# Altium PCB SA_1800_WIFI.PcbDoc (part 1 of 2)
Units mm, origin at the board's own origin, x right, y up, seen from the top; angles counter-clockwise.
Board outline 82.96 x 62.54 mm, 2 copper layers (Top Layer, Bottom Layer); 208 components, 153 nets, 664 pads, 246 vias.
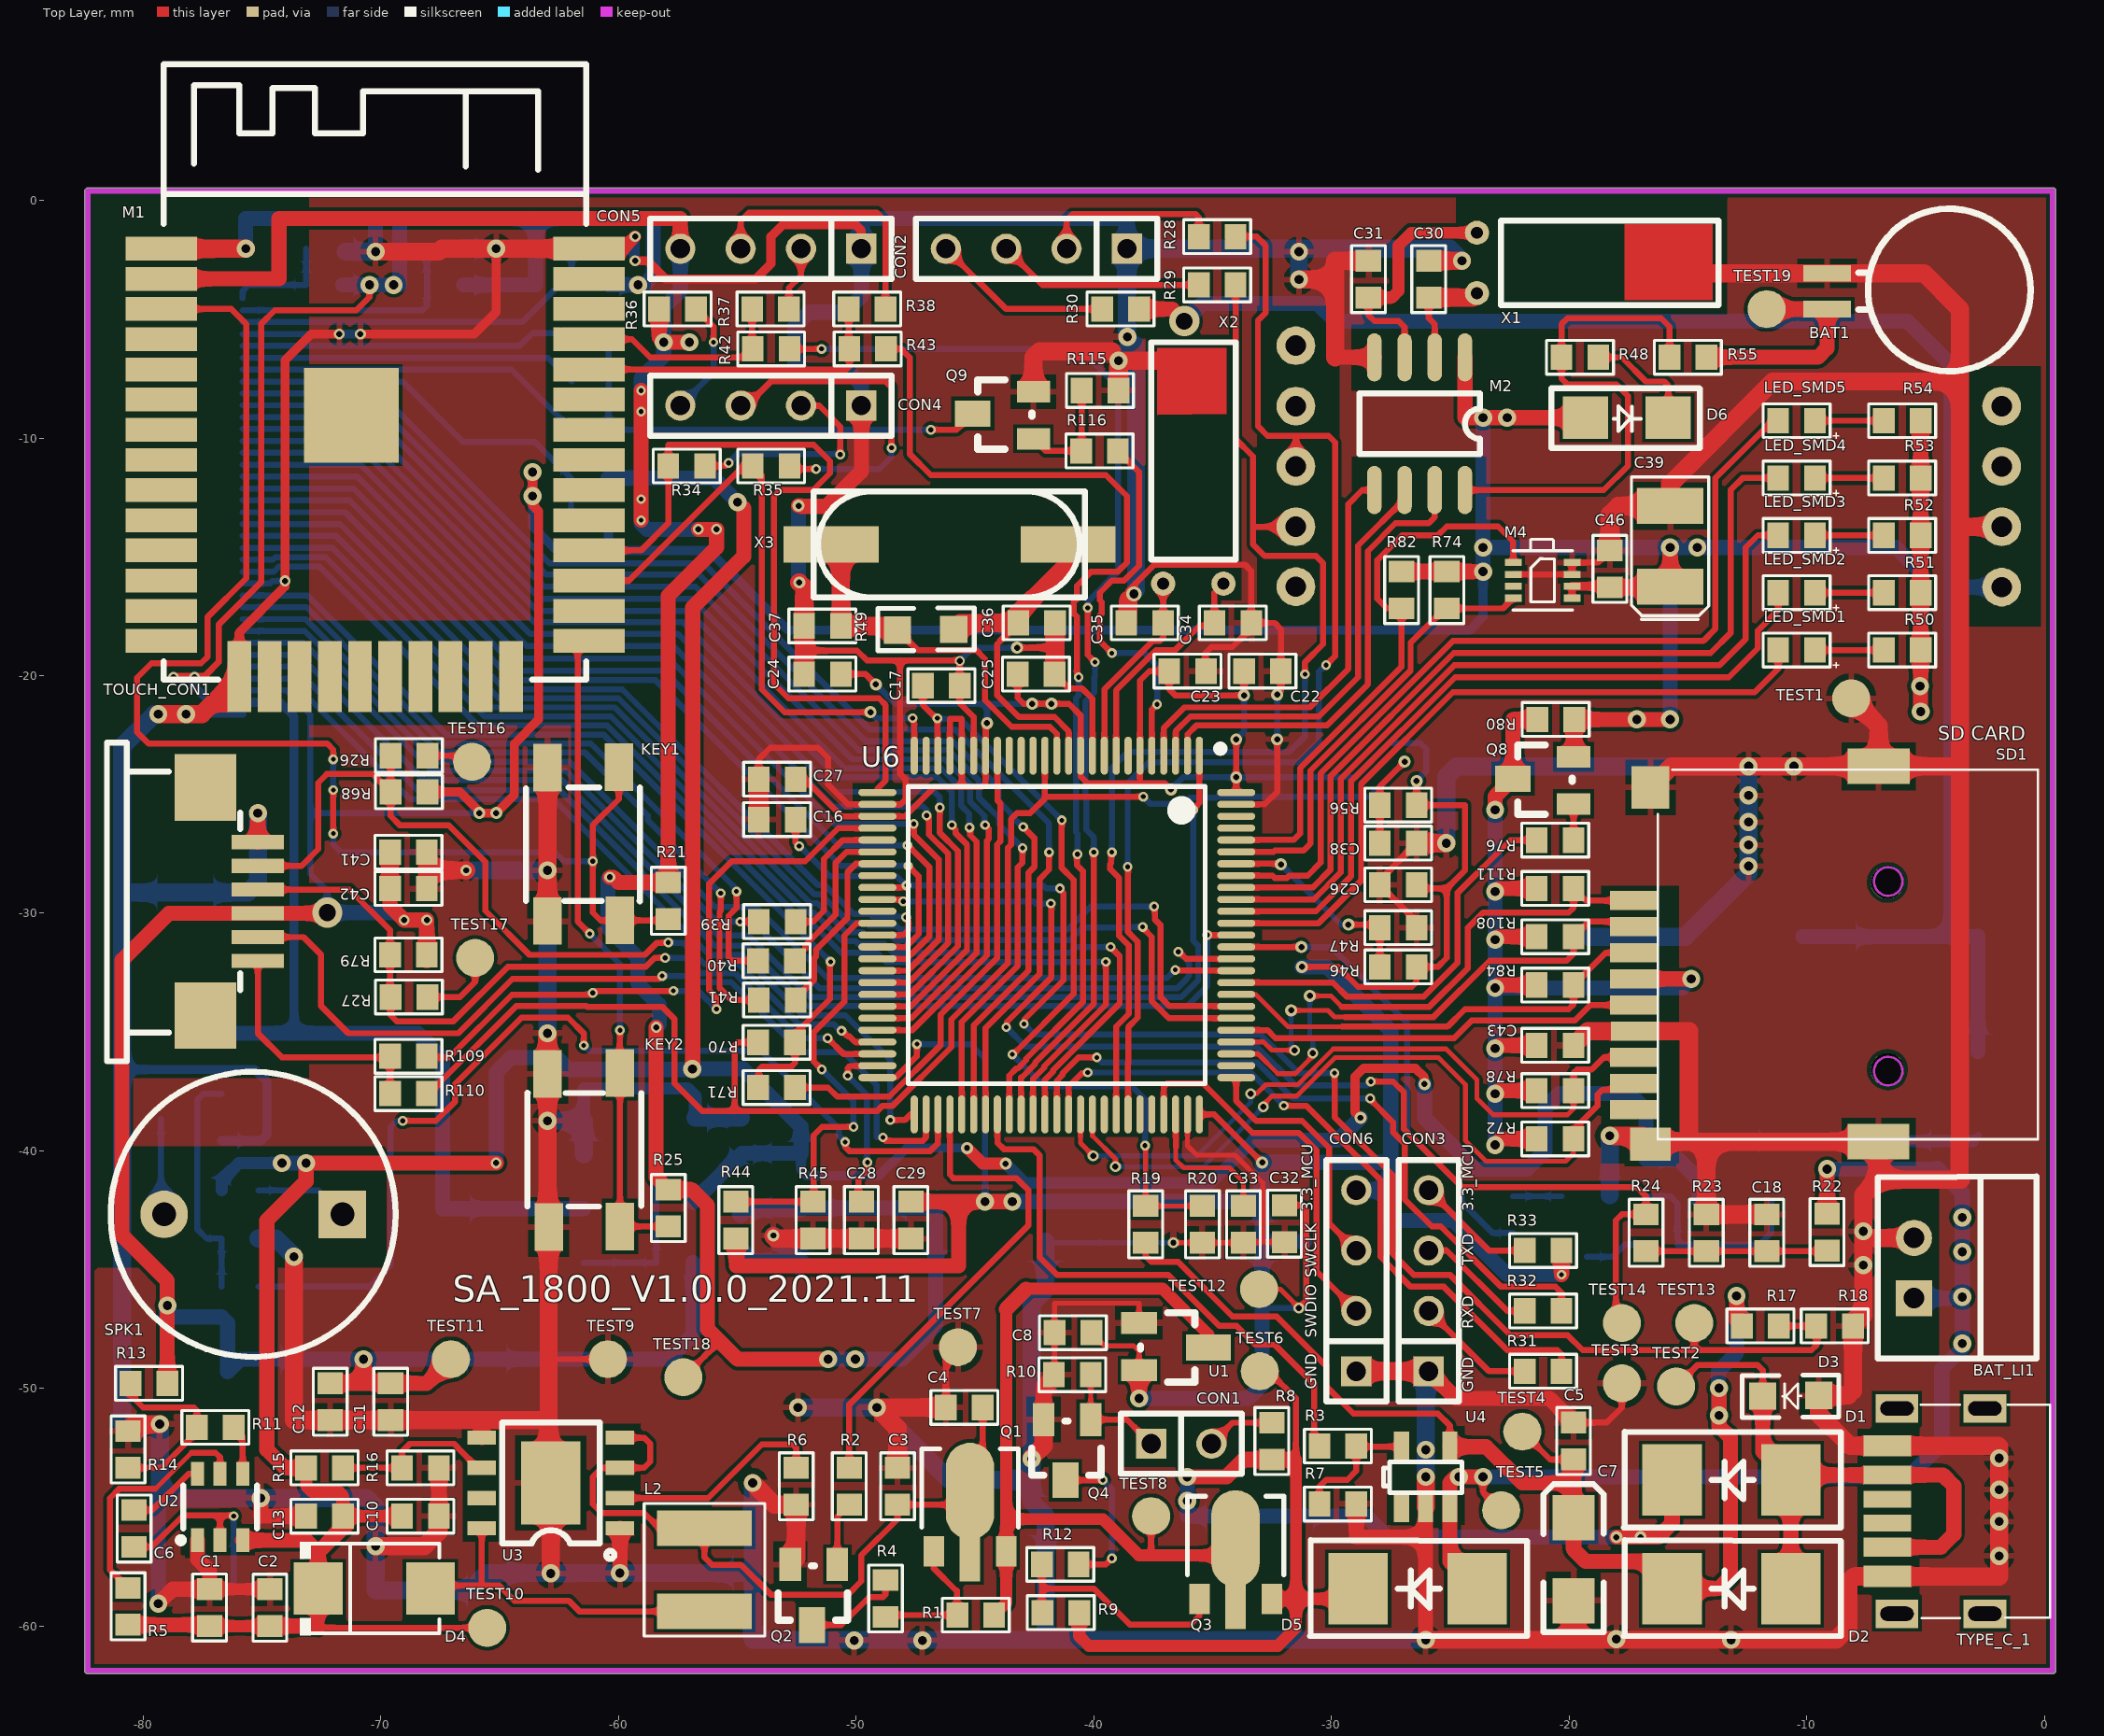
[diagram p0: Top Layer view]
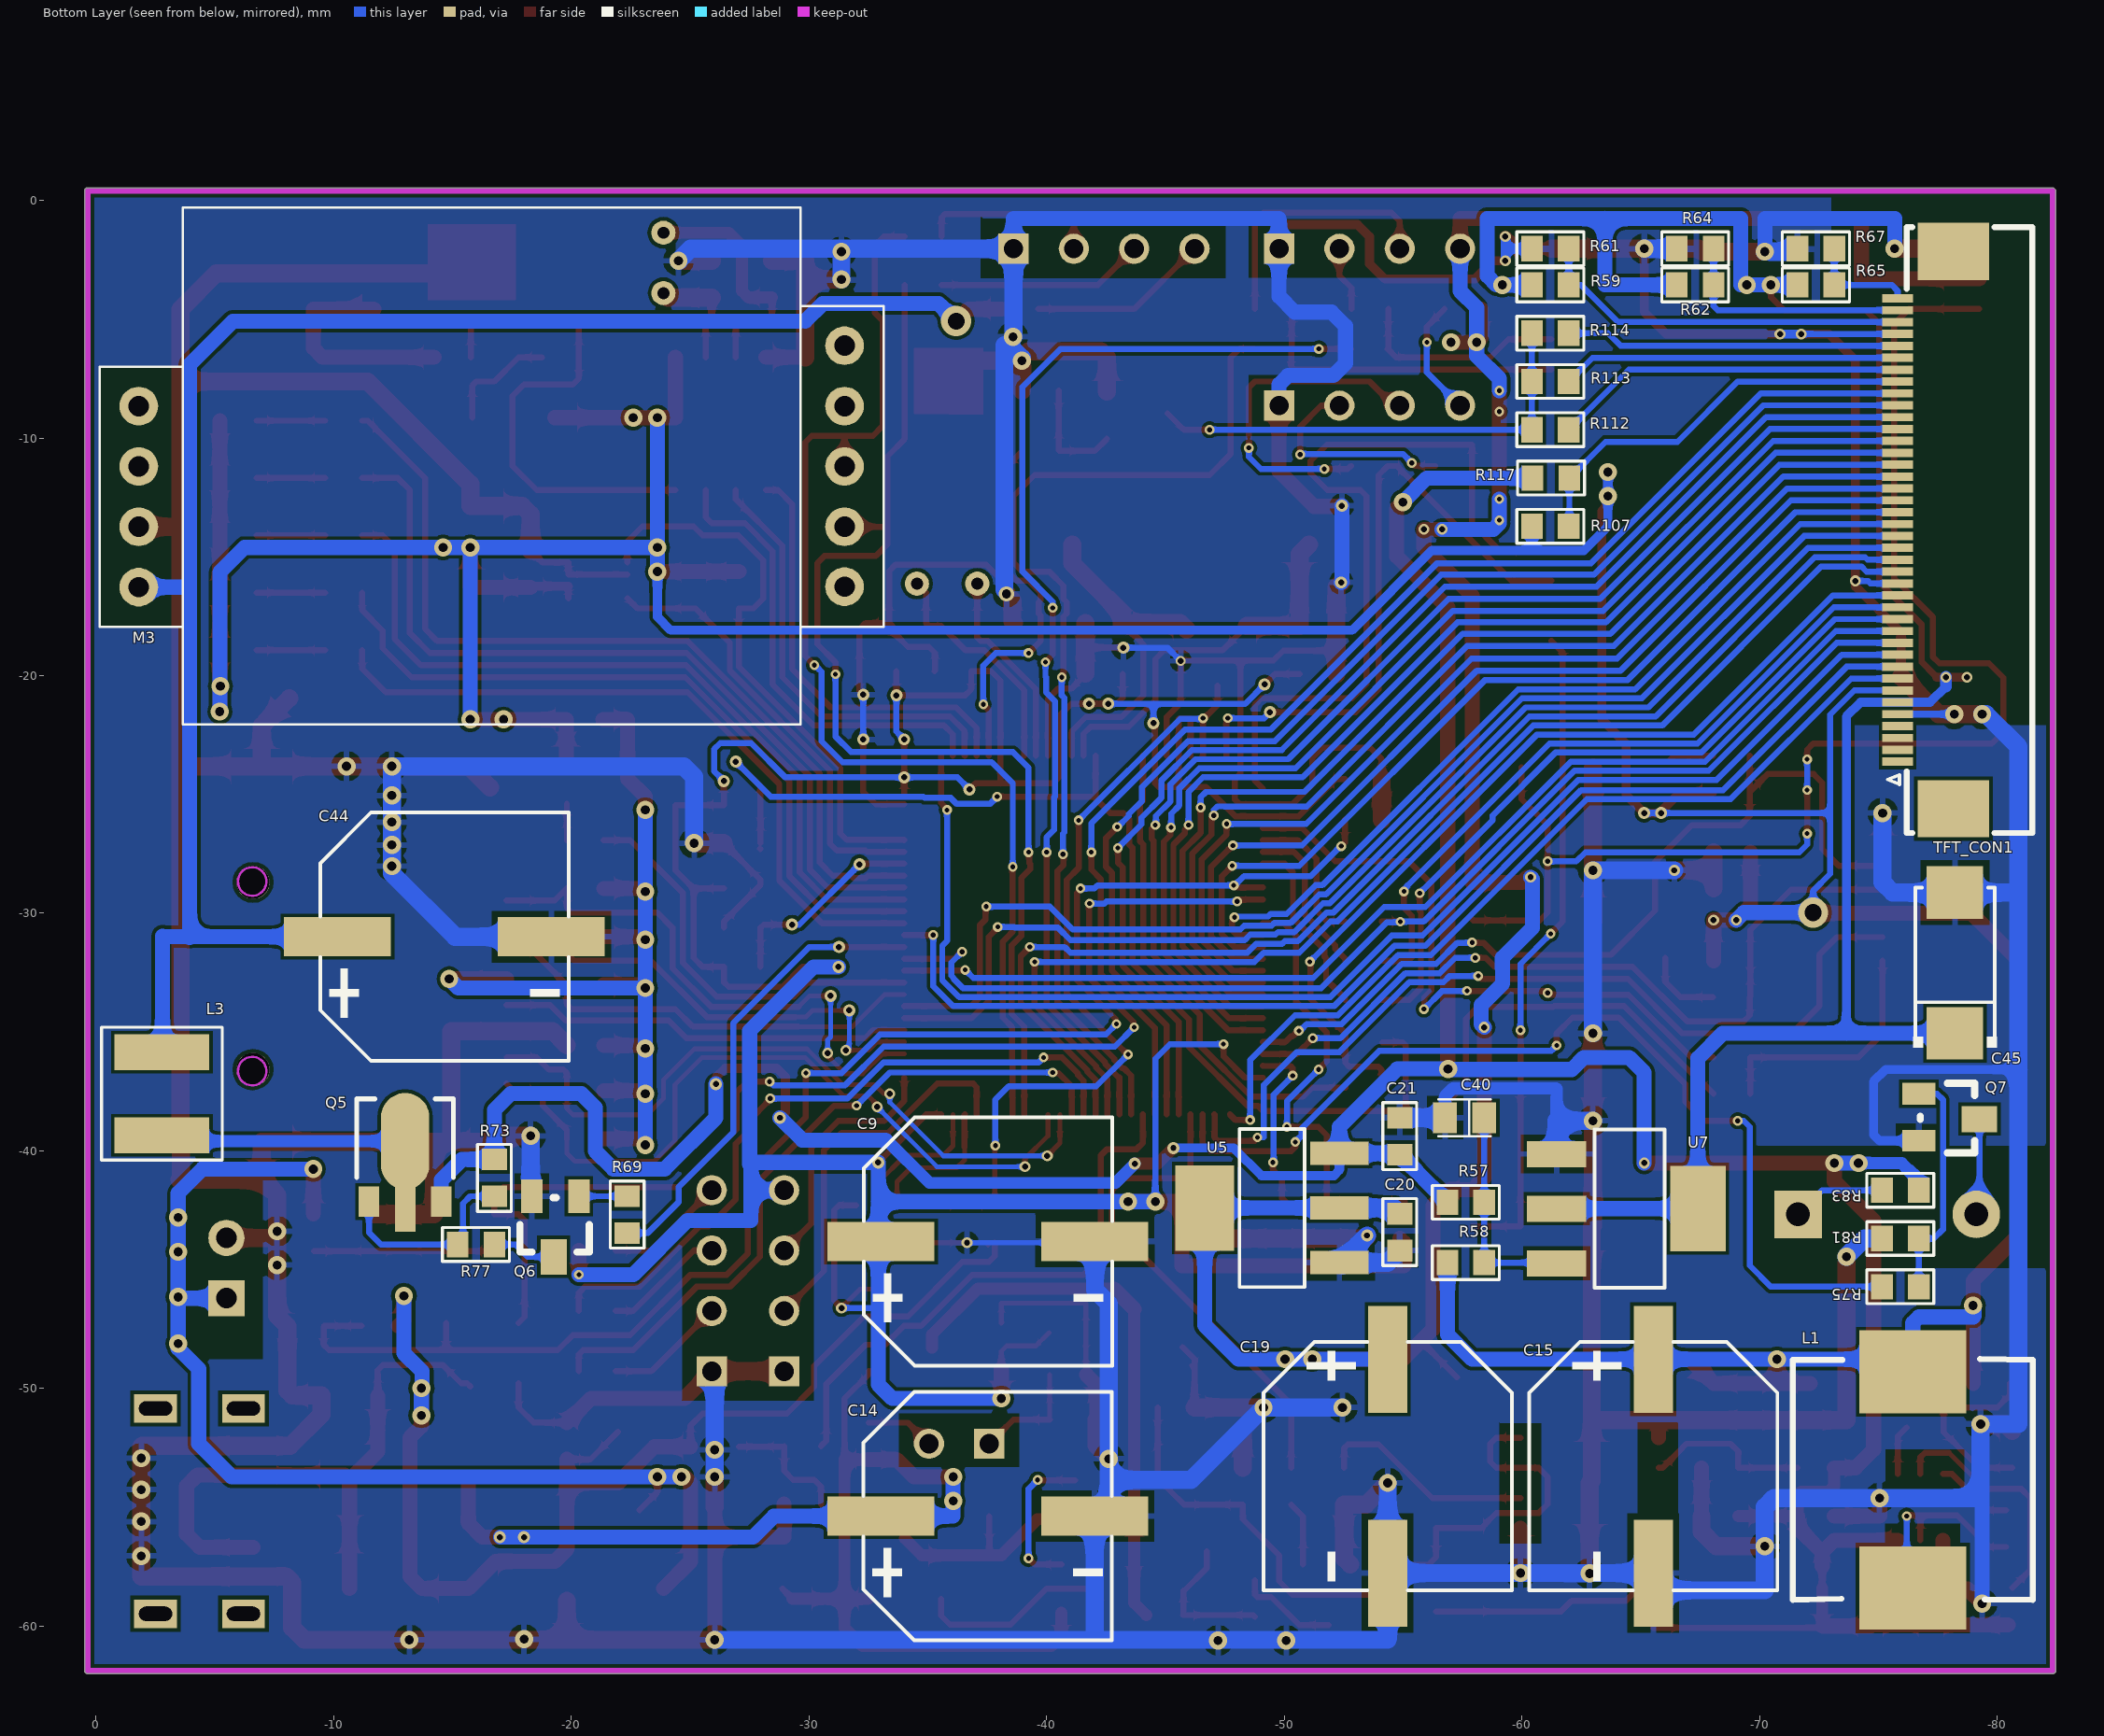
[diagram p1: Bottom Layer view, seen from below]

## Layer stack, top to bottom
Top Solder: solder mask 0.0102, Solder Resist, Dk 3.5
Top Layer: signal copper 0.0356
Dielectric1: dielectric 0.32, FR-4, Dk 4.8
Bottom Layer: signal copper 0.0356
Bottom Solder: solder mask 0.0102, Solder Resist, Dk 3.5

## Board outline
-82.474,-61.874 -82.474,0.381 cw(c-82.347,0.381) -82.423,0.483 cw(c-82.321,0.406) -82.321,0.534 0.356,0.534 cw(c0.356,0.406) 0.483,0.406 0.483,-61.874 cw(c0.356,-61.874) 0.356,-62.002 -82.347,-62.002 cw(c-82.347,-61.874)

## Design rules (kind name [scope] priority, off if disabled: settings)
Clearance [All] p1: gap=0.152 ignorepadtopadclearanceinfootprint=FALSE except(0: Arc-Hole Track-Hole SMDPad-Hole THPad-Hole Via-Hole Fill-Hole Poly-Hole Region-Hole Text-Hole)
PolygonConnect [All] p1: connectstyle=Relief reliefconductorwidth=0.254 reliefentries=4 polygonreliefangle="90 Angle" airgapwidth=0.254
RoutingVias [All] p1: holewidth=0.203 width=0.406 viastyle="Through Hole" minholewidth=0.203 minwidth=0.406 maxholewidth=0.203 maxwidth=0.406
SilkToSolderMaskClearance SilkscreenOverComponentPads [IsPad] p1: minsilkscreentomaskgap=0.254 clearancetoexposedcopper=TRUE
SolderMaskExpansion [All] p1: expansion=0.102
Width [All] p1: maxlimit=1.016 minlimit=0.203 preferedwidth=0.203 minimp=50.000000 maximp=50.000000 favimp=50.000000
29 further rules are at their usual default settings.

## Components (designator, comment, footprint, x,y, rotation, side; value= is the part's Value field where it differs from the comment)
BAT1 "DMS3R3304R" BATTERY -9.144,-4.572 r270 top
BAT_LI1 "BAT_LI" BAT_LI -5.486,-46.203 r90 top
C1 "100nF" C0603 -77.216,-59.994 r90 top
C2 "22uF" C0603 -74.676,-60 r90 top
C3 "22uF" C0603 -48.26,-53.34 r270 top
C4 "22uF" C0603 -46.228,-50.8 r0 top
C5 "100nF" C0603 -19.812,-51.435 r270 top
C6 "1uF" C0603 -80.391,-56.667 r90 top
C7 "1uF" 1UF -19.812,-55.448 r90 top
C8 "100nF" C0603 -41.656,-47.65 r0 top
C9 "470UF/10V" 470UF/10V -33.037,-43.815 r180 bottom
C10 "22uF" C0603 -67.564,-55.372 r180 top
C11 "22uF" C0603 -69.596,-49.784 r270 top
C12 "100nF" C0603 -72.136,-49.784 r270 top
C13 "22uF" C0603 -73.152,-55.372 r0 top
C14 "470UF/10V" 470UF/10V -33.02,-55.372 r180 bottom
C15 "470UF/10V" 470UF/10V -65.532,-48.768 r270 bottom
C16 "100nF" C0603 -54.102,-26.06 r0 top
C17 "100nF" C0603 -45.644,-20.422 r180 top
C18 "100nF" C0603 -11.684,-42.672 r270 top
C19 "470UF/10V" 470UF/10V -54.356,-48.768 r270 bottom
C20 "10uF" C0603 -54.864,-44.196 r90 bottom
C21 "10uF" C0603 -54.864,-38.608 r270 bottom
C22 "100nF" C0603 -33.68,-19.812 r0 top
C23 "100nF" C0603 -36.83,-19.812 r0 top
C24 "100nF" C0603 -50.648,-19.939 r180 top
C25 "100nF" C0603 -43.205,-19.939 r0 top
C26 "100nF" C0603 -26.416,-28.804 r180 top
C27 "100nF" C0603 -54.102,-24.359 r0 top
C28 "100nF" C0603 -49.784,-43.688 r90 top
C29 "100nF" C0603 -47.701,-43.688 r90 top
C30 "100nF" C0603 -25.908,-2.54 r270 top
C31 "100nF" C0603 -28.448,-2.54 r270 top
C32 "100nF" C0603 -31.979,-42.291 r270 top
C33 "100nF" C0603 -33.706,-42.316 r270 top
C34 "10pF" C0603 -34.925,-17.78 r0 top
C35 "10pF" C0603 -37.084,-17.78 r180 top
C36 "22pF" C0603 -43.18,-17.78 r0 top
C37 "22pF" C0603 -50.648,-17.907 r180 top
C38 "100nF" C0603 -26.416,-27.051 r180 top
C39 "100UF/6.3V" CJX_100UF_1210C -15.748,-16.256 r270 top
C40 "10uF/10V/Tan" 10uF/10V/Tan -58.42,-38.608 r0 bottom
C41 "2.2uF" C0603 -68.072,-27.432 r180 top
C42 "100nF" C0603 -68.072,-28.956 r180 top
C43 "100nF" C0603 -19.812,-35.56 r180 top
C44 "470UF/10V" 470UF/10V -10.16,-30.988 r180 bottom
C45 "22uF/10V/Tan" 22uF/10V/Tan -78.232,-35.052 r270 bottom
C46 "100nF" C0603 -18.288,-14.732 r270 top
CON1 "SWITCH2" SWITCH2 -37.592,-52.324 r0 top
CON2 "CON4_CO2" CON4_CO2 -38.608,-2.032 r180 top
CON3 "CON4_USART" CON4_USART -25.908,-49.276 r90 top
CON4 "CON4_WIFI" CON4_WIFI -49.784,-8.636 r180 top
CON5 "WIFI_DEBUG_USART" CON4_USART -49.784,-2.032 r180 top
CON6 "CON4_SWD" DIP4 -28.956,-49.276 r90 top
D1 "1N5817" 1N5817 -10.668,-53.848 r0 top
D2 "1N5817" 1N5817 -10.668,-58.42 r0 top
D3 "MMSZ5V6CW" MMSZ5V6CW -9.49,-50.292 r180 top
D4 "SS54" SS54 -72.644,-58.42 r0 top
D5 "1N5817" 1N5817 -23.876,-58.42 r0 top
D6 "1N4148" 1N4148 -19.304,-9.144 r0 top
KEY1 "KEY" KEY -62.992,-23.876 r0 top
KEY2 "KEY" KEY -59.944,-43.18 r180 top
L1 "4.7uH" LDO_4.7uH -76.2,-54.864 r90 bottom
L2 "3.3uH" 3.3uH_AP2005 -56.388,-55.88 r0 top
L3 "3.3uH" 3.3uH_AP2005 -2.769,-39.345 r0 bottom
LED_SMD1 "GREEN" LED_SMD -9.652,-18.923 r180 top
LED_SMD2 "GREEN" LED_SMD -9.652,-16.51 r180 top
LED_SMD3 "RED" LED_SMD -9.652,-14.097 r180 top
LED_SMD4 "YELLOW" LED_SMD -9.652,-11.684 r180 top
LED_SMD5 "GREEN" LED_SMD -9.652,-9.271 r180 top
M1 "ESP32_S" ESP32_S -79.248,-2.032 r0 top
M2 "DS1302Z" DS1302Z -24.384,-6.604 r270 top
M3 "CM1106_CO2" CM1106_CO2 -31.496,-16.256 r0 bottom
M4 "SHT30" SHT30 -22.352,-15.24 r0 top
Q1 "2SJ316_PNP" 2SJ316_PNP 156.972,-31.2 r0 top
Q2 "9013" 9013 -50.8,-57.404 r180 top
Q3 "2SJ316_PNP" 2SJ316_PNP 168.148,-33.2 r0 top
Q4 "9013" 9013 -40.132,-51.308 r180 top
Q5 "2SJ316_PNP" 2SJ316_PNP -215.191,-16.478 r180 bottom
Q6 "9013" 9013 -20.32,-41.91 r0 bottom
Q7 "9013" 9013 -76.708,-37.592 r270 bottom
Q8 "9012" 9012 -19.812,-25.4 r90 top
Q9 "9013" 9013 -42.545,-10.033 r90 top
R1 "3.9M" R0603 -44.196,-59.536 r180 top
R2 "10K" R0603 -50.292,-53.34 r270 top
R3 "2.5K" R0603 -28.956,-52.424 r180 top
R4 "1K" R0603 -48.768,-59.614 r90 top
R5 "100K" R0603 -80.645,-59.944 r90 top
R6 "3K" R0603 -52.527,-53.34 r270 top
R7 "2.5K" R0603 -28.956,-54.864 r180 top
R8 "100K" R0603 -32.512,-52.99 r90 top
R9 "3.9M" R0603 -42.164,-59.436 r0 top
R10 "100K" R0603 -40.132,-49.422 r180 top
R11 "10K" R0603 -76.2,-51.638 r180 top
R12 "1K" R0603 -40.64,-57.404 r180 top
R13 "40.2K" R0603 -78.99,-49.784 r180 top
R14 "13K" R0603 -80.645,-53.34 r90 top
R15 "110K" R0603 -73.152,-53.34 r0 top
R16 "15K" R0603 -67.564,-53.34 r180 top
R17 "500K" R0603 -11.176,-47.371 r180 top
R18 "500K" R0603 -8.052,-47.371 r180 top
R19 "20K" R0603 -37.821,-42.316 r270 top
R20 "1M" R0603 -35.433,-43.866 r90 top
R21 "12K" R0603 -57.912,-30.251 r90 top
R22 "510K" R0603 -9.144,-44.196 r90 top
R23 "510K" R0603 -14.224,-42.672 r270 top
R24 "1K" R0603 -16.764,-42.672 r270 top
R25 "12K" R0603 -57.912,-43.18 r90 top
R26 "0R" R0603 -69.596,-23.368 r0 top
R27 "0R" R0603 -69.596,-33.528 r0 top
R28 "0R" R0603 -34.036,-1.524 r180 top
R29 "0R" R0603 -34.036,-3.556 r180 top
R30 "0R" R0603 -38.1,-4.572 r180 top
R31 "0R" R0603 -20.32,-49.276 r180 top
R32 "0R" R0603 -20.32,-46.736 r180 top
R33 "0R" R0603 -20.32,-44.196 r180 top
R34 "0R" R0603 -57.912,-11.176 r0 top
R35 "0R" R0603 -54.356,-11.176 r0 top
R36 "0R" R0603 -58.293,-4.572 r0 top
R37 "0R" R0603 -52.832,-4.572 r180 top
R38 "0R" R0603 -48.768,-4.572 r180 top
R39 "0R" R0603 -54.102,-30.353 r0 top
R40 "0R" R0603 -54.127,-32.004 r0 top
R41 "0R" R0603 -54.102,-33.655 r0 top
R42 "0R" R0603 -54.356,-6.248 r0 top
R43 "0R" R0603 -50.292,-6.248 r0 top
R44 "10K" R0603 -55.067,-43.688 r90 top
R45 "10K" R0603 -51.816,-43.688 r90 top
R46 "10K" R0603 -26.416,-32.258 r180 top
R47 "10K" R0603 -26.416,-30.607 r180 top
R48 "1K" R0603 -20.32,-6.604 r0 top
R49 "1M" R1M -48.26,-18.085 r0 top
R50 "1K" R0603 -5.207,-18.923 r180 top
R51 "1K" R0603 -5.207,-16.51 r180 top
R52 "1K" R0603 -5.207,-14.097 r180 top
R53 "1K" R0603 -5.207,-11.684 r180 top
R54 "1K" R0603 -5.207,-9.271 r180 top
R55 "100R" R0603 -14.224,-6.604 r180 top
R56 "100K" R0603 -26.416,-25.451 r180 top
R57 "0R" R0603 -58.42,-42.164 r0 bottom
R58 "0R" R0603 -58.42,-44.704 r0 bottom
R59 "0R" R0603 -61.976,-3.556 r0 bottom
R61 "0R" R0603 -61.976,-2.032 r0 bottom
R62 "0R" R0603 -68.072,-3.556 r0 bottom
R64 "0R" R0603 -68.072,-2.032 r0 bottom
R65 "0R" R0603 -73.152,-3.556 r0 bottom
R67 "0R" R0603 -73.152,-2.032 r0 bottom
R68 "10K" R0603 -69.596,-24.892 r0 top
R69 "3.9M" R0603 -22.352,-41.91 r270 bottom
R70 "0R" R0603 -52.578,-35.433 r180 top
R71 "0R" R0603 -54.127,-37.338 r0 top
R72 "50K" R0603 -19.812,-39.497 r180 top
R73 "3.9M" R0603 -16.764,-41.91 r90 bottom
R74 "10K" R0603 -25.146,-17.17 r90 top
R75 "5K" R0603 -76.708,-45.72 r0 bottom
R76 "1K" R0603 -19.812,-26.924 r180 top
R77 "680K" R0603 -16.764,-43.942 r0 bottom
R78 "50K" R0603 -19.812,-37.465 r180 top
R79 "10K" R0603 -68.072,-31.75 r180 top
R80 "NC" R0603 -21.336,-21.844 r0 top
R81 "50K" R0603 -75.159,-43.688 r180 bottom
R82 "10K" R0603 -27.051,-17.17 r90 top
R83 "0R" R0603 -75.159,-41.656 r180 bottom
R84 "50K" R0603 -19.812,-33.02 r180 top
R107 "0R" R0603 -61.976,-13.716 r0 bottom
R108 "50K" R0603 -19.812,-30.988 r180 top
R109 "0R" R0603 -68.072,-36.017 r180 top
R110 "0R" R0603 -68.072,-37.592 r180 top
R111 "50K" R0603 -19.812,-28.956 r180 top
R112 "10R" R0603 -61.976,-9.652 r0 bottom
R113 "10R" R0603 -61.976,-7.62 r0 bottom
R114 "10R" R0603 -61.976,-5.588 r0 bottom
R115 "10K" R0603 -40.513,-8.001 r0 top
R116 "10K" R0603 -38.989,-10.541 r180 top
R117 "0R" R0603 -60.452,-11.684 r180 bottom
SD1 "SD" SD -17.272,-29.464 r90 top
SPK1 "BUZZER" BUZZER -71.628,-42.672 r180 top
TEST1 "GND" TEST_POINT#1 -8.128,-20.955 r90 top
TEST2 "USB_VBUS" TEST_POINT#1 -15.494,-49.911 r180 top
TEST3 "GND" TEST_POINT#1 -17.78,-49.784 r90 top
TEST4 "VBUS_T" TEST_POINT#2 -22.25,-52.187 r0 top
TEST5 "BAT_LI" TEST_POINT#3 -22.86,-55.372 r180 top
TEST6 "POW_ALL" TEST_POINT#1 -33.02,-49.276 r270 top
TEST7 "GND" TEST_POINT#1 -45.72,-48.26 r90 top
TEST8 "VCC_ALL_CTR" TEST_POINT#1 -37.592,-55.372 r90 top
TEST9 "GND" TEST_POINT#1 -60.452,-48.768 r270 top
TEST10 "BOOST_5V" TEST_POINT#1 -65.532,-60.071 r270 top
TEST11 "VCC_3.3V" TEST_POINT#1 -67.056,-48.768 r90 top
TEST12 "VCC_3.3V_MCU" TEST_POINT#1 -33.045,-45.822 r90 top
TEST13 "AD" TEST_POINT#1 -14.732,-47.244 r0 top
TEST14 "AD" TEST_POINT#1 -17.78,-47.244 r90 top
TEST16 "SCL2" TEST_POINT#1 -66.167,-23.622 r0 top
TEST17 "SDA2" TEST_POINT#1 -66.04,-31.877 r0 top
TEST18 "VCC_3.3V_WIFI" TEST_POINT#1 -57.277,-49.53 r180 top
TEST19 "BAT_TEST" TEST_POINT#1 -11.684,-4.572 r0 top
TFT_CON1 "TFT_CON" TFT_CON -75.819,-23.622 r90 bottom
TOUCH_CON1 "TOUCH_CON" TOUCH_CON -75.184,-32.004 r270 top
TYPE_C_1 "6PIN" TYPE_C_6P -6.604,-57.912 r90 top
U1 "AS1360" AS1360 -38.1,-47.244 r270 top
U2 "LDO_BL8003" LDO_BL8003 -77.724,-56.388 r270 top
U3 "AP2005" AP2005 -59.944,-55.88 r90 top
U4 "STC4054-4.2" STC4054-4.2 -27.051,-54.991 r90 top
U5 "AMS1117_3.3" AMS1117_3.3 -52.324,-44.704 r180 bottom
U6 "STM32F405VGT6" STM32F405VGT6 -35.56,-23.368 r180 top locked
U7 "AMS1117_1.8V" 1117_1.8V -61.468,-40.132 r0 bottom
X1 "32768KHZ" 32768KHZ -23.876,-3.9 r90 top
X2 "32.768KHZ" 32768KHZ -34.544,-16.129 r180 top
X3 "8M" 8M -41.084,-14.478 r180 top

## Footprints (in the part's own frame and the unit in brackets; to place one, negate y for a bottom-side part, rotate by r counter-clockwise, add the part's x,y. Pads: shape width x height; smd on the part's side, far side on the other; paste and mask are expansions set on the pad)
1N4148 [mil] "1N4148"
  rect 75x70 smd: 1(0,0) 2(137,0)
  silkscreen extent -56,-50 189,49
1N5817 [mm] "1N5817"
  rect 2.5x3 smd: 1(0,0) 2(-5,0)
  silkscreen extent -7.03,-2 2.11,2.03
1UF [mil] "1UF"
  rect 75x70 smd: 1(0,0) 2(-137,0)
  silkscreen extent -189,-50 56,50
2SJ316_PNP [mil] "2SJ316_PNP"
  rect 34x50 smd: 1(-8020,-1010) 3(-7900,-1010)
  rect 34x100 smd: 2(-7960,-1010)
  oval 80x160 smd: 2(-7960,-910)
  silkscreen extent -8040,-970 -7880,-840
3.3uH_AP2005 [mm] "3.3uH_AP2005"
  rect 4x1.5 smd: 1(0,0) 2(0,-3.5)
  silkscreen extent -2.54,-4.54 2.54,1.04
8M [mm] "8M"
  rect 4x1.524 smd: 1(0,0) 2(9.97,0)
  silkscreen extent -0.71,-2.23 10.72,2.23
10uF/10V/Tan [mm] "10uF/10V/Tan"
  rect 1x1.3 smd: 1(0,0) 2(1.65,0)
  silkscreen extent -0.28,-0.78 1.93,0.78
22uF/10V/Tan [mm] "22uF/10V/Tan"
  rect 2.207x2.376 smd: 1(0,0) 2(-5.923,0)
  silkscreen extent -6.14,-1.75 0.6,1.75
470UF/10V [mm] "470UF/10V"
  rect 4.5x1.65 smd: 1(0,0) 2(9,0)
  silkscreen extent -0.73,-5.23 9.73,5.23
1117_1.8V [mm] "1117_1.8V"
  rect 2.5x1.1 smd: 1(0,0) 2(0,2.3) 3(0,4.6)
  rect 2.34x3.6 smd: 4(-5.94,2.3)
  silkscreen extent -4.54,-1.03 -1.6,5.63
9012 [mil] "9012"
  rect 36x55.12 smd: 1(0,0) 2(78,0)
  rect 43.31x59.06 smd: 3(42,100.5)
  silkscreen extent -17,2 98,92
9013 [mil] "9013"
  rect 36x55.12 smd: 1(0,0) 2(78,0)
  rect 43.31x59.06 smd: 3(42,100.5)
  silkscreen extent -17,2 98,92
32768KHZ [mil] "32768KHZ"
  round 40 hole 20: 1(0,0) 2(100,0)
  silkscreen extent -20,-400 120,-40
AMS1117_3.3 [mm] "AMS1117_3.3"
  rect 2.47x0.98 smd: 1(0,0) 2(0,2.3) 3(0,4.6)
  rect 2.47x3.6 smd: 4(-5.67,2.3)
  silkscreen extent -4.21,-1.03 -1.46,5.63
AP2005 [mm] "AP2005"
  rect 0.6x1.2 smd: 1(0,0) 2(1.27,0) 3(2.54,0) 4(3.81,0) 5(3.81,5.817) 6(2.54,5.817) 7(1.27,5.817) 8(0,5.817)
  rect 3.5x2.5 smd: 9(1.905,2.908)
  silkscreen extent -1.29,0.24 4.46,4.96
AS1360 [mil] "AS1360"
  rect 36x59.06 smd: 1(0,0) 2(78,0)
  rect 43.31x74.8 smd: 3(41,115)
  silkscreen extent -17,2 98,92
BAT_LI [mil] "BAT_LI"
  rect 60x60 hole 34: 1(0,0)
  round 60 hole 34: 2(100,0)
  silkscreen extent -100,-203 202,60
BATTERY [mm] "BATTERY"
  rect 0.7x2 smd: 1(0,0) 2(-1.5,0)
  silkscreen extent -4.22,1.32 2.62,8.56
BUZZER [mm] "BUZZER"
  rect 2x2 hole 1: 1(0,0)
  round 2 hole 1: 2(7.5,0)
  silkscreen extent -2.25,-6 9.75,6
C0603 [mil] "C0603"
  rect 36x42 smd: 1(0,0) 2(61,0)
  silkscreen extent -25,-28 86,28
CJX_100UF_1210C [mm] "CJX_100UF_1210C"
  rect 1.5x2.8 smd: 1(0,0) 2(-3.4,0)
  silkscreen extent -4.62,-1.63 1.37,1.63
CM1106_CO2 [mil] "CM1106_CO2"
  round 64 hole 34: 1(0,0) 2(0,-99.21) 3(0,-199.21) 4(0,-299.21) 5(0,-399.21) 6(1169.29,-299.21) 7(1169.29,-199.21) 8(1169.29,-99.21) 9(1169.29,0.79)
  silkscreen extent -65,-628 1234,228
CON4_CO2 [mil] "CON4_CO2"
  rect 50x50 hole 32: 1(0,0)
  round 50 hole 32: 2(100,0) 3(200,0) 4(300,0)
  silkscreen extent -50,-50 350,50
CON4_USART [mil] "CON4_USART"
  rect 50x50 hole 32: 1(0,0)
  round 50 hole 32: 2(100,0) 3(200,0) 4(300,0)
  silkscreen extent -50,-50 350,50
CON4_WIFI [mil] "CON4_WIFI"
  rect 50x50 hole 32: 1(0,0)
  round 50 hole 32: 2(100,0) 3(200,0) 4(300,0)
  silkscreen extent -50,-50 350,50
DIP4 [mil] "DIP4"
  rect 50x50 hole 32: 1(0,0)
  round 50 hole 32: 2(100,0) 3(200,0) 4(300,0)
  silkscreen extent -50,-50 350,50
DS1302Z [mil] "DS1302Z"
  oval 80x24 smd: 1(0,0) 2(0,-50) 3(0,-100) 4(0,-150) 5(220,-150) 6(220,-100) 7(220,-50) 8(220,0)
  silkscreen extent 60,-175 160,25
ESP32_S [mm] "ESP32_S"
  rect 3x1 smd: 1(0,0) 2(0,-1.27) 3(0,-2.54) 4(0,-3.81) 5(0,-5.08) 6(0,-6.35) 7(0,-7.62) 8(0,-8.89) 9(0,-10.16) 10(0,-11.43) 11(0,-12.7) 12(0,-13.97) 13(0,-15.24) 14(0,-16.51) 25(18,-16.51) 26(18,-15.24) 27(18,-13.97) 28(18,-12.7) 29(18,-11.43) 30(18,-10.16) 31(18,-8.89) 32(18,-7.62) 33(18,-6.35) 34(18,-5.08) 35(18,-3.81) 36(18,-2.54) 37(18,-1.27) 38(18,0)
  rect 1x3 smd: 15(3.285,-18.01) 16(4.555,-18.01) 17(5.825,-18.01) 18(7.095,-18.01) 19(8.365,-18.01) 20(9.635,-18.01) 21(10.905,-18.01) 22(12.175,-18.01) 23(13.445,-18.01) 24(14.715,-18.01)
  rect 4x4 smd: 39(8,-7.01)
  silkscreen extent 0.11,-18.14 17.89,7.77
KEY [mm] "KEY"
  rect 1.2x2 smd: 1(0,-6.452) 1(0,0) 2(3,0.024) 2(3.049,-6.426)
  silkscreen extent -0.9,-5.63 3.89,-0.84
LDO_4.7uH [mm] "LDO_4.7uH"
  rect 3.5x4.5 smd: 1(-3.534,-0.254) 2(5.566,-0.254)
  silkscreen extent -4.03,-5.3 6.1,4.8
LDO_BL8003 [mm] "LDO_BL8003"
  rect 1x0.55 smd: 1(0,0) 2(0,0.95) 3(0,1.9) 4(-2.8,1.9) 5(-2.8,0.95) 6(-2.8,0)
  silkscreen extent -2.3,-0.83 0.12,2.5
LED_SMD [mil] "LED_SMD"
  rect 36x42 smd: 1(0,0) 2(61,0)
  silkscreen extent -40,-28 86,30
MMSZ5V6CW [mil] "MMSZ5V6CW"
  rect 45x45 smd: 1(0,0) 2(93,1)
  silkscreen extent -33,-34 127,37
R1M [mil] "R1M"
  rect 45x45 smd: 1(0,0) 2(93,1)
  silkscreen extent -33,-34 127,37
R0603 [mil] "R0603"
  rect 36x42 smd: 1(0,0) 2(61,0)
  silkscreen extent -25,-28 86,28
SD [mm] "SD"
  rect 1.4x1.7 smd: 0(-10.25,-0.695)
  rect 1.5x2.6 smd: 0(-10.15,-10.296) 0(5.65,-10.3)
  rect 1.8x1.6 smd: 0(4.76,-0.695)
  rect 0.8x2 smd: 1(0,0) 2(-1.1,0) 3(-2.2,0) 4(-3.3,0) 5(-4.4,0) 6(-5.5,-0.035) 7(-6.6,0.016) 8(-7.7,0) 9(-8.8,0)
  Keep-Out Layer circle w0.1: c0.8,-10.703 r0.6
  Keep-Out Layer circle w0.1: c-7.18,-10.703 r0.6
  silkscreen extent -10.05,-17 5.5,-1
SHT30 [mm] "SHT30"
  rect 0.7x0.3 smd: 1(0,0) 2(0,-0.5) 3(0,-1) 4(0,-1.5) 5(2.475,-1.5) 6(2.475,-1) 7(2.475,-0.5) 8(2.475,0)
  silkscreen extent -0.01,-2 2.49,0.98
SS54 [mm] "SS54"
  rect 2.047x2.192 smd: 1(0,0) 2(4.722,0)
  silkscreen extent -0.76,-1.96 5.1,1.96
STC4054-4.2 [mil] "STC4054-4.2"
  rect 50x25 smd: 1(0,0) 2(0,-40) 3(0,-80) 4(100,-80) 5(100,0)
  silkscreen extent 24,-100 75,30
STM32F405VGT6 [mm] "STM32F405VGT6"
  oval 0.3x1.6 smd: 1(0,0) 2(0.5,0) 3(1,0) 4(1.5,0) 5(2,0) 6(2.5,0) 7(3,0) 8(3.5,0) 9(4,0) 10(4.5,0) 11(5,0) 12(5.5,0) 13(6,0) 14(6.5,0) 15(7,0) 16(7.5,0) 17(8,0) 18(8.5,0) 19(9,0) 20(9.5,0) 21(10,0) 22(10.5,0) 23(11,0) 24(11.5,0) 25(12,0) 51(12,15.1) 52(11.5,15.1) 53(11,15.1) 54(10.5,15.1) 55(10,15.1) 56(9.5,15.1) 57(9,15.1) 58(8.5,15.1) 59(8,15.1) 60(7.5,15.1) 61(7,15.1) 62(6.5,15.1) 63(6,15.1) 64(5.5,15.1) 65(5,15.1) 66(4.5,15.1) 67(4,15.1) 68(3.5,15.1) 69(3,15.1) 70(2.5,15.1) 71(2,15.1) 72(1.5,15.1) 73(1,15.1) 74(0.5,15.1) 75(0,15.1)
  oval 1.6x0.3 smd: 26(13.55,1.55) 27(13.55,2.05) 28(13.55,2.55) 29(13.55,3.05) 30(13.55,3.55) 31(13.55,4.05) 32(13.55,4.55) 33(13.55,5.05) 34(13.55,5.55) 35(13.55,6.05) 36(13.55,6.55) 37(13.55,7.05) 38(13.55,7.55) 39(13.55,8.05) 40(13.55,8.55) 41(13.55,9.05) 42(13.55,9.55) 43(13.55,10.05) 44(13.55,10.55) 45(13.55,11.05) 46(13.55,11.55) 47(13.55,12.05) 48(13.55,12.55) 49(13.55,13.05) 50(13.55,13.55) 76(-1.55,13.55) 77(-1.55,13.05) 78(-1.55,12.55) 79(-1.55,12.05) 80(-1.55,11.55) 81(-1.55,11.05) 82(-1.55,10.55) 83(-1.55,10.05) 84(-1.55,9.55) 85(-1.55,9.05) 86(-1.55,8.55) 87(-1.55,8.05) 88(-1.55,7.55) 89(-1.55,7.05) 90(-1.55,6.55) 91(-1.55,6.05) 92(-1.55,5.55) 93(-1.55,5.05) 94(-1.55,4.55) 95(-1.55,4.05) 96(-1.55,3.55) 97(-1.55,3.05) 98(-1.55,2.55) 99(-1.55,2.05) 100(-1.55,1.55)
  silkscreen extent -1.03,-0.45 12.25,13.8
SWITCH2 [mil] "SWITCH2"
  rect 50x50 hole 32: 1(0,0)
  round 50 hole 32: 2(100,0)
  silkscreen extent -50,-50 150,50
TEST_POINT#1 [mm] "TEST_POINT"
  round 1.6 smd: 1(0,0)
TEST_POINT#2 [mm] "TEST_POINT"
  round 1.6 smd: 1(0.279,0.371)
TEST_POINT#3 [mm] "TEST_POINT"
  round 1.6 smd: 1(0,-0.244)
TFT_CON [mm] "TFT_CON"
  rect 0.35x1.3 smd: 1(0,0) 2(0.5,0) 3(1,0) 4(1.5,0) 5(2,0) 6(2.5,0) 7(3,0) 8(3.5,0) 9(4,0) 10(4.5,0) 11(5,0) 12(5.5,0) 13(6,0) 14(6.5,0) 15(7,0) 16(7.5,0) 17(8,0) 18(8.5,0) 19(9,0) 20(9.5,0) 21(10,0) 22(10.5,0) 23(11,0) 24(11.5,0) 25(12,0) 26(12.5,0) 27(13,0) 28(13.5,0) 29(14,0) 30(14.5,0) 31(15,0) 32(15.5,0) 33(16,0) 34(16.5,0) 35(17,0) 36(17.5,0) 37(18,0) 38(18.5,0) 39(19,0) 40(19.5,0)
  rect 2.4x3 smd: 41(21.475,-2.35) 42(-1.975,-2.35)
  silkscreen extent -3,-5.68 22.5,0.42
TOUCH_CON [mm] "TOUCH_CON"
  rect 0.6x2.2 smd: 1(0,0) 2(-1,0) 3(-2,0) 4(-3,0) 5(-4,0) 6(-5,-0.001)
  rect 2.8x2.6 smd: 7(-7.3,-2.207) 8(2.3,-2.205)
  silkscreen extent -9.18,-6.35 4.23,-0.74
TYPE_C_6P [mm] "TYPE_C_6P"
  rect 1.2x1.8 hole 0.6 slot 1.4 at 90 deg: 0(-1.57,-0.4) 0(-1.57,-4.1) 0(7.07,-4.1) 0(7.07,-0.4)
  rect 0.9x2 smd: 1(0,0) 6(5.5,0)
  rect 0.8x2 smd: 2(1.23,0) 5(4.27,0)
  rect 0.7x2 smd: 3(2.25,0) 4(3.25,0)
  silkscreen extent -1.75,-6.85 7.22,-1.4

## Part data
BAT1: library part BATTERY
C1 C2 C3 C4 C5 C6 C8 C10 C11 C12 C13 C16 C17 C18 C20 C21 C22 C23 C24 C25 C26 C27 C28 C29 C30 C31 C32 C33 C34 C35 C36 C37 C38 C41 C42 C43 C46: library part C0603
C39: library part CJX_100UF_1210C, "100uF/6.3V"
CON5: library part CON4_USART
CON6: library part CON4
L1: library part LDO_4.7uH
L2 L3: library part 3.3uH_AP2005
LED_SMD1 LED_SMD2 LED_SMD3 LED_SMD4 LED_SMD5: library part LED_SMD
M2: "CLOCK"
Q1 Q3 Q5: "PNP"
Q2 Q4 Q6 Q7 Q9: "NPN"
R1 R2 R3 R4 R5 R6 R7 R8 R9 R10 R11 R12 R13 R14 R15 R16 R17 R18 R19 R20 R21 R22 R23 R24 R25 R26 R27 R28 R29 R30 R31 R32 R33 R34 R35 R36 R37 R38 R39 R40 R41 R42 R43 R44 R45 R46 R47 R48 R50 R51 R52 R53 R54 R55 R56 R57 R58 R59 R61 R62 R64 R65 R67 R68 R69 R70 R71 R72 R73 R74 R75 R76 R77 R78 R79 R80 R81 R82 R83 R84 R107 R108 R109 R110 R111 R112 R113 R114 R115 R116 R117: library part R0603
R49: library part R1M
TEST1 TEST2 TEST3 TEST4 TEST5 TEST6 TEST7 TEST8 TEST9 TEST10 TEST11 TEST12 TEST13 TEST14 TEST16 TEST17 TEST18 TEST19: library part TEST_POINT
TYPE_C_1: library part TYPE_C_6P
U7: library part 1117_1.8V
X2: library part 32768KHZ

## Free pads (board coordinates)
  round 1.4 hole 1.4 unplated: 0(-6.604,-36.576) 0(-6.604,-28.702)

## Via types
v1: diameter 0.762, hole 0.381, Top Layer to Bottom Layer, 94 vias
v2: diameter 0.406, hole 0.203, Top Layer to Bottom Layer, 93 vias
v3: diameter 0.508, hole 0.254, Top Layer to Bottom Layer, 32 vias
v4: diameter 0.457, hole 0.254, Top Layer to Bottom Layer, 23 vias
v5: diameter 1.27, hole 0.711, Top Layer to Bottom Layer, 2 vias
v6: diameter 0.635, hole 0.381, Top Layer to Bottom Layer, 1 vias
v7: diameter 0.406, hole 0.254, Top Layer to Bottom Layer, 1 vias

## Nets (pads, with @x,y where several pads share a name; then routed paths per layer and width w, separated by ;. In a path a pad name is that pad's centre, name@x,y a point inside that pad or via, vN(x,y) a via of type N, cw(c..) or ccw(c..) an arc to the next point about the centre after c; other vN are vias at no path point)
BAT_LI: BAT_LI1.1 D5.1 R22.2 TEST5.1 U4.3 | length 49.8
  Top Layer w0.254: v1(-23.622,-53.721) -23.622,-54.366 TEST5.1@-22.86,-55.128
  Top Layer w0.635: D5.1@-23.876,-58.42 -25.019,-57.277 U4.3@-25.019,-54.991 -25.019,-53.975 -24.765,-53.721 v1(-24.638,-53.721) v1(-23.622,-53.721) ; R22.2@-9.144,-42.647 v1@-9.144,-41.021
  Bottom Layer w0.635: v1(-24.638,-53.721) v1(-23.622,-53.721) -5.715,-53.721 -4.318,-52.324 -4.318,-49.174 -3.454,-48.311 v1(-3.454,-48.108) v1(-3.454,-46.152) ; v1(-9.144,-40.767) -4.52,-40.767 -4.495,-40.742 -3.454,-41.782 v1(-3.454,-42.799) v1(-3.454,-44.247) v1(-3.454,-46.152) ; BAT_LI1.1@-5.486,-46.203 -3.505,-46.203 v1(-3.454,-46.152)
BAT_TEST: BAT1.1 R55.1 TEST19.1 | length 9.4
  Top Layer w0.635: R55.1@-14.224,-6.604 -9.525,-6.604 -9.144,-6.223 BAT1.1@-9.144,-4.572 TEST19.1@-11.684,-4.572
BOOST_5V: C1.1 C2.1 C10.2 C13.2 C21.2 D4.1 Q5.3 R5.1 R15.1 R57.2 R73.2 R83.2 R117.1 TEST10.1 U2.3 U5.3 | length 163.5
  Top Layer w0.254: R5.1@-80.645,-59.944 -80.464,-59.944 R5.1@-80.414,-59.994 ; C1.1@-77.266,-59.944 C1.1@-77.216,-59.994 C1.1@-77.21,-60 ; -74.803,-52.578 -74.803,-52.451 ; -72.715,-60 -72.644,-60.071 TEST10.1@-65.532,-60.071 ; D4.1@-72.644,-58.42 D4.1@-72.644,-57.478
  Top Layer w0.381: v3(-28.778,-38.608) -29.007,-38.379 -29.007,-36.881 -28.651,-36.525 -26.467,-36.525 -26.086,-36.906 v3(-26.086,-37.186)
  Top Layer w0.508: C1.1@-77.21,-60 C2.1@-74.676,-60 ; R15.1@-73.152,-53.34 -73.152,-54.102 -72.898,-54.356 -71.755,-54.356 -71.603,-54.508 C13.2@-71.603,-55.372 C10.2@-69.113,-55.372 ; -72.644,-60.071 D4.1@-72.644,-58.42 ; v3(-45.339,-39.878) -44.679,-40.538 v3(-43.713,-40.538)
  Top Layer w0.635: R5.1@-80.464,-59.944 C1.1@-77.266,-59.944 ; U2.3@-75.824,-56.388 -73.152,-56.388 -72.644,-56.896 ; -74.803,-52.578 -74.041,-53.34 R15.1@-73.152,-53.34 ; -74.803,-52.451 -74.803,-42.926 -73.152,-41.275 v1(-73.152,-40.513) v4(-65.151,-40.513) ; C2.1@-74.676,-60 -72.715,-60 ; D4.1@-72.644,-57.478 -72.644,-56.896 ; C13.2@-71.603,-55.372 -71.603,-55.855 -72.644,-56.896 ; v1@-56.882,-36.601 -56.882,-17.131 -54.737,-14.986 v1@-54.737,-12.954
  Bottom Layer w0.254: C21.2@-54.864,-40.157 C21.2@-54.811,-40.104
  Bottom Layer w0.381: U5.3@-52.324,-40.104 -52.324,-40.818 -52.095,-41.046 -49.047,-41.046 -47.879,-39.878 v3@-45.39,-39.878 ; v3(-28.778,-38.608) -28.753,-38.583 v3@-28.753,-38.557
  Bottom Layer w0.508: R83.2@-76.708,-41.656 -76.708,-41.224 -75.997,-40.513 v1(-74.168,-40.513) ; v3(-43.713,-40.538) -42.901,-41.351 -35.077,-41.351 -33.249,-39.522 -33.223,-39.548
  Bottom Layer w0.635: v1(-74.168,-40.513) v1(-73.152,-40.513) ; v4(-65.151,-40.513) -65.151,-36.703 -64.516,-36.068 -62.611,-36.068 -62.103,-36.576 -56.921,-36.576 v1(-56.896,-36.551) -54.762,-36.551 -52.324,-38.989 U5.3@-52.324,-40.104 C21.2@-54.811,-40.104 ; R117.1@-60.452,-11.684 -56.007,-11.684 v1(-54.991,-12.7) ; R57.2@-56.871,-42.164 C21.2@-54.864,-40.157 ; -33.223,-39.548 -29.718,-39.548 v3(-28.778,-38.608) ; v3(-26.086,-37.186) -26.086,-38.608 -23.927,-40.767 -21.768,-40.767 -21.006,-40.005 -21.006,-38.176 -20.422,-37.592 -17.45,-37.592 -16.764,-38.278 R73.2@-16.764,-40.361 -15.392,-40.361 -14.531,-41.222 Q5.3@-14.531,-42.132
DS_CE: M2.5 U6.4 | length 18.2
  Top Layer w0.254: U6.4@-37.06,-23.368 -37.06,-22.201 -36.195,-21.336 -30.912,-21.336 -29.286,-19.71 -29.286,-12.776 -28.702,-12.192 M2.5@-28.194,-12.192
DS_IO: M2.6 U6.3 | length 18.3
  Top Layer w0.254: U6.3@-36.56,-23.368 -36.551,-23.359 -36.551,-22.327 -35.941,-21.717 -30.531,-21.717 -28.88,-20.066 -28.88,-14.529 -26.924,-12.573 M2.6@-26.924,-12.192
DS_SCLK: M2.7 U6.2 | length 19.5
  Top Layer w0.254: U6.2@-36.06,-23.368 -36.051,-23.359 -36.051,-22.462 -35.687,-22.098 -30.201,-22.098 -28.473,-20.371 -28.473,-14.757 -27.305,-13.589 -25.908,-13.589 -25.654,-13.335 M2.7@-25.654,-12.192
ESP32_D_RXD_PER: M1.34 R38.2 R43.1 | length 13.4
  Top Layer w0.254: M1.34@-61.248,-7.112 -50.419,-7.112 -50.292,-6.985 R43.1@-50.292,-6.248 ; R43.1@-50.317,-6.223 R38.2@-50.317,-4.572
ESP32_D_TXD_PER: M1.35 R37.2 R42.1 | length 9
  Top Layer w0.254: M1.35@-61.248,-5.842 -59.436,-5.842 -58.674,-6.604 -54.712,-6.604 R42.1@-54.356,-6.248 -54.381,-6.223 R37.2@-54.381,-4.572
GND: BAT1.2 BAT_LI1.2 C1.2 C2.2 C3.1 C4.1 C5.1 C7.2 C8.1 C9.2 C10.1 C11.2 C12.2 C13.1 C14.2 C15.2 C16.1 C17.1 C18.1 C19.2 C20.1 C21.1 C22.2 C23.2 C24.2 C25.2 C26.2 C27.1 C28.1 C29.1 C30.1 C31.1 C32.2 C33.2 C34.2 C35.2 C36.2 C37.2 C38.1 C39.2 C40.2 C41.1 C42.1 C43.1 C44.2 C45.2 C46.1 CON2.1 CON3.1 CON4.1 CON5.1 CON6.1 D3.1 KEY1.1 KEY2.2 M1.1 M1.15 M1.38 M2.4 M3.8 M4.2 M4.7 M4.8 Q2.2 Q4.2 Q6.2 Q7.2 Q9.2 R6.2 R7.1 R10.2 R14.2 R16.1 R18.1 R20.1 R23.1 R45.1 R47.1 R61.2 R64.2 R67.2 R81.1 R115.2 SD1.0 SD1.6 TEST1.1 TEST3.1 TEST7.1 TEST9.1 TFT_CON1.5 TFT_CON1.16 TFT_CON1.37 TOUCH_CON1.6 TYPE_C_1.1 TYPE_C_1.6 U1.1 U2.1 U3.1 U3.5 U3.9 U4.2 U5.1 U6.10 U6.20 U6.27 U6.74 U6.99 U7.1 | length 773.3
  Top Layer w0.203: R10.2@-41.681,-49.422 -41.656,-49.397 C8.1@-41.656,-47.65 -41.656,-46.406 -38.1,-46.406 U1.1@-38.1,-47.244 U1.1@-38.125,-47.219 ; v4(-36.652,-43.866) R20.1@-35.433,-43.866 C33.2@-33.706,-43.866 -33.68,-43.84 -32.868,-43.84 ; U6.74@-36.06,-38.468 -36.06,-39.785 -35.662,-40.183 -34.061,-40.183 -32.893,-41.351 -32.893,-43.815 -32.868,-43.84 ; C32.2@-31.979,-43.84 -32.868,-43.84 ; -3.566,-41.163 -3.515,-41.215
  Top Layer w0.254: C2.2@-74.682,-58.445 C2.2@-74.676,-58.451 ; v1@-73.66,-44.736 v1(-73.66,-44.45) ; -65.786,-51.333 -65.761,-51.359 ; v1@-65.278,-2.159 v1@-65.151,-2.286 ; KEY2.2@-62.993,-43.155 KEY2.2@-62.944,-43.204 ; U3.9@-62.944,-53.883 U3.9@-62.852,-53.975 ; -62.944,-48.895 -62.817,-48.768 TEST9.1@-60.452,-48.768 ; C27.1@-54.102,-24.359 -54.102,-23.52 -53.619,-23.038 -51.613,-23.038 -51.181,-23.47 -51.181,-24.587 -50.35,-25.418 U6.27@-49.11,-25.418 -48.125,-25.418 -47.93,-25.222 -47.93,-24.359 -48.158,-24.13 -48.158,-19.355 ; -52.197,-18.948 -49.962,-18.948 -49.555,-19.355 -48.158,-19.355 ; C4.1@-46.228,-50.8 -46.228,-48.768 TEST7.1@-45.72,-48.26 ; U6.20@-45.06,-23.368 -45.06,-21.742 -45.644,-21.158 C17.1@-45.644,-20.422 v7(-45.644,-19.38) -45.644,-19.355 -48.158,-19.355 ; v3(-43.231,-18.821) -41.631,-18.821 ; C25.2@-41.631,-19.914 C25.2@-41.656,-19.939 -41.046,-20.549 -40.488,-20.549 -40.06,-20.976 U6.10@-40.06,-23.368 ; -38.557,-16.802 -38.557,-16.434 -37.465,-15.342 -33.63,-15.342 -33.376,-15.596 C34.2@-33.376,-17.78 ; C23.2@-35.281,-19.812 -35.306,-19.787 -35.306,-19.05 -35.052,-18.796 -34.163,-18.796 -33.655,-18.288 -33.655,-18.059 C34.2@-33.376,-17.78 ; U6.99@-34.01,-25.418 -32.809,-25.418 -32.283,-24.892 v3(-32.283,-22.682) v3@-32.283,-22.581 ; v3(-32.283,-20.803) -32.131,-20.65 C22.2@-32.131,-19.812 -32.131,-18.041 -32.392,-17.78 C34.2@-33.376,-17.78 ; R47.1@-26.416,-30.607 -26.416,-30.353 C26.2@-27.965,-28.804 -27.965,-28.6 C38.1@-26.416,-27.051 ; M4.2@-22.352,-15.74 M4.7@-19.877,-15.74 M4.8@-19.877,-15.24 -18.796,-15.24 C46.1@-18.288,-14.732 ; C5.1@-19.812,-51.435 -18.415,-51.435 -17.78,-50.8 TEST3.1@-17.78,-49.784 ; -15.039,-39.614 -14.947,-39.522 ; -3.618,-23.814 -3.556,-23.876 ; -3.566,-39.614 -3.556,-39.604 ; -3.556,-13.716 -3.536,-13.736
  Top Layer w0.381: M1.15@-75.963,-20.042 -75.963,-18.178 -74.041,-16.256 v4(-74.041,-16.012) -74.041,-6.731 -72.932,-5.622 v4(-71.755,-5.622) ; v4(-70.866,-5.622) -66.074,-5.622 -65.151,-4.699 v1@-65.151,-2.286 ; v4(-59.309,-2.54) -58.801,-2.54 -58.039,-3.302 -54.229,-3.302 -53.594,-2.667 -53.594,-1.524 -53.086,-1.016 -50.038,-1.016 -49.784,-1.27 CON5.1@-49.784,-2.032
  Top Layer w0.508: C1.2@-77.216,-58.445 C2.2@-74.682,-58.445 ; M1.38@-61.248,-2.032 -59.817,-2.032 v4(-59.309,-1.524)
  Top Layer w0.635: v1(-79.375,-59.055) -78.765,-58.445 C1.2@-77.216,-58.445 -77.216,-57.683 -77.724,-57.175 U2.1@-77.724,-56.388 ; TOUCH_CON1.6@-75.185,-27.004 v1(-75.185,-25.782) ; v1(-75.057,-54.61) -75.057,-55.372 C13.1@-73.152,-55.372 ; C10.1@-67.564,-55.372 R16.1@-67.564,-53.34 ; U3.5@-65.761,-52.07 -65.761,-51.359 ; v1(-59.944,-57.768) U3.1@-59.944,-55.88 ; v3(-52.426,-12.852) -52.324,-12.852 -52.299,-12.878 -51.257,-12.878 -49.784,-11.405 CON4.1@-49.784,-8.636 ; Q4.2@-42.113,-51.308 -42.113,-49.854 R10.2@-41.681,-49.422 ; -29.845,-6.604 M2.4@-28.194,-6.604 ; R7.1@-28.956,-54.864 -28.956,-56.261 -26.035,-56.261 ; v1(-26.035,-60.579) -26.035,-56.261 ; U4.2@-26.035,-54.991 -26.035,-56.261 ; CON3.1@-25.908,-49.276 -24.765,-50.419 -20.828,-50.419 C5.1@-19.812,-51.435
  Top Layer w0.762: R14.2@-80.645,-51.791 -80.353,-51.498 v1(-79.311,-51.498) ; v1(-79.375,-21.622) v1(-78.2,-21.622) -77.543,-21.622 M1.15@-75.963,-20.042 ; M1.1@-79.248,-2.032 v1(-75.692,-2.032) ; v1@-73.66,-44.736 -73.66,-51.333 C12.2@-72.136,-51.333 C11.2@-69.596,-51.333 -65.786,-51.333 -63.211,-51.333 ; v1(-70.231,-56.642) -68.18,-56.642 -67.564,-56.026 C10.1@-67.564,-55.372 ; v1(-70.231,-2.159) -67.564,-2.159 -67.437,-2.032 v1(-65.151,-2.032) M1.38@-61.248,-2.032 ; C42.1@-68.072,-28.956 -68.072,-28.194 ; C41.1@-68.072,-27.432 -68.072,-28.194 ; v4(-66.421,-28.194) -68.072,-28.194 ; KEY2.2@-62.993,-43.155 KEY2.2@-62.993,-36.754 -62.993,-35.053 v1(-62.992,-35.052) ; KEY1.1@-62.992,-30.328 v1(-62.992,-28.194) KEY1.1@-62.992,-23.876 ; U3.9@-62.944,-53.883 -62.944,-48.895 KEY2.2@-62.944,-43.204 ; v1(-62.852,-57.785) U3.9@-62.852,-53.975 ; v1(-54.356,-53.975) -53.442,-54.889 R6.2@-52.527,-54.889 -52.527,-57.15 Q2.2@-52.781,-57.404 ; C16.1@-54.102,-26.06 C27.1@-54.102,-24.359 ; v3@-53.492,-43.586 -53.391,-43.688 R45.1@-51.816,-43.688 C28.1@-49.784,-43.688 C29.1@-47.701,-43.688 ; v3(-52.4,-16.078) -52.197,-16.281 C37.2@-52.197,-17.907 -52.197,-18.948 C24.2@-52.197,-19.939 ; C3.1@-48.26,-53.34 -48.26,-51.67 v1(-49.13,-50.8) C4.1@-46.228,-50.8 ; v1(-42.618,-52.959) -42.618,-52.905 -42.113,-52.4 Q4.2@-42.113,-51.308 ; Q9.2@-42.545,-8.052 -42.545,-6.604 -42.291,-6.35 -39.243,-6.35 ; C25.2@-41.631,-19.914 -41.631,-18.821 C36.2@-41.631,-17.78 ; R115.2@-38.964,-8.001 v1(-38.964,-6.744) -35.877,-6.744 -35.865,-6.731 ; C35.2@-38.633,-17.78 -38.557,-17.704 -38.557,-16.802 ; v1(-31.369,-3.327) -29.845,-3.327 ; -29.845,-6.604 -29.845,-3.327 ; CON6.1@-28.956,-49.276 CON3.1@-25.908,-49.276 ; C31.1@-28.448,-2.54 -29.845,-2.54 -29.845,-3.327 ; C38.1@-26.416,-27.051 v1(-25.171,-27.051) ; v1(-26.035,-60.579) -19.812,-60.579 ; U4.2@-26.035,-54.991 v1(-26.035,-53.721) ; C30.1@-25.908,-2.54 v1(-24.511,-2.54) ; C7.2@-19.812,-58.928 -19.812,-60.579 ; C43.1@-19.812,-35.56 -19.216,-34.964 SD1.6@-17.237,-34.964 -14.947,-34.964 -14.947,-39.522 ; v1(-18.288,-39.37) -16.921,-39.37 SD1.0@-16.577,-39.714 -16.477,-39.614 -15.039,-39.614 -14.224,-39.614 ; C46.1@-18.288,-14.732 -18.288,-13.208 -17.936,-12.856 C39.2@-15.748,-12.856 -15.748,-11.938 -11.43,-7.62 -3.556,-7.62 ; SD1.0@-16.577,-24.704 -15.687,-23.814 v1(-12.446,-23.814) v1(-10.541,-23.814) SD1.0@-6.972,-23.814 ; -15.267,-3.072 BAT1.2@-9.144,-3.072 -5.056,-3.072 -3.556,-4.572 -3.556,-7.62 ; C18.1@-11.684,-42.672 R23.1@-14.224,-42.672 -14.224,-39.614 ; TEST1.1@-8.128,-20.955 -6.972,-22.111 SD1.0@-6.972,-23.814 ; BAT_LI1.2@-5.486,-43.663 v1@-7.62,-43.663 ; -3.618,-23.814 SD1.0@-6.972,-23.814 ; -3.566,-41.163 -3.566,-39.614 ; -3.556,-39.604 -3.556,-23.876 -3.556,-13.716 -3.556,-7.62 ; -3.536,-13.736 M3.8@-1.796,-13.736 ; -3.515,-41.215 -6.976,-41.215 ; -19.812,-60.579 v1(-13.183,-60.579) -8.763,-60.579 -8.255,-60.071 -8.255,-58.166 -8.001,-57.912 TYPE_C_1.1@-6.604,-57.912 -1.905,-57.912 v1(-1.905,-57.048) v1(-1.905,-55.601) v1(-1.905,-54.254) v1(-1.905,-52.934) -1.905,-52.451 -1.944,-52.412 TYPE_C_1.6@-6.604,-52.412 -8.167,-52.412 -9.49,-51.089 D3.1@-9.49,-50.292 -8.255,-50.292 -8.052,-50.089 R18.1@-8.052,-47.371 -7.62,-46.939 v1(-7.62,-44.806) v1@-7.62,-43.663 ; -14.224,-39.614 SD1.0@-6.976,-39.614 -6.976,-41.215 ; v1@-7.62,-43.663 v1(-7.62,-43.383) -7.62,-41.859 -6.976,-41.215
  Bottom Layer w0.203: C9.2@-42.037,-43.815 -41.986,-43.866 v4(-36.652,-43.866)
  Bottom Layer w0.254: -80.899,-29.083 -80.853,-29.129 ; TFT_CON1.37@-75.819,-5.622 v4(-71.755,-5.622) ; TFT_CON1.16@-75.812,-16.129 TFT_CON1.16@-75.819,-16.122 -74.669,-16.122 -74.559,-16.012 v4(-74.041,-16.012) ; R67.2@-71.603,-2.032 R67.2@-71.476,-2.159 ; v7(-45.644,-19.38) -45.085,-18.821 v3(-43.231,-18.821) ; v3(-32.283,-22.682) v3(-32.283,-20.803) ; Q6.2@-18.339,-41.91 Q6.2@-18.288,-41.859
  Bottom Layer w0.305: v1(-78.2,-21.622) TFT_CON1.5@-75.819,-21.622
  Bottom Layer w0.381: -80.899,-36.576 -75.311,-36.576 -74.803,-37.084 -74.803,-39.319 -75.057,-39.573 Q7.2@-76.708,-39.573 ; v4(-71.755,-5.622) v4(-70.866,-5.622) ; R61.2@-60.427,-2.032 -59.309,-2.032 ; v4(-59.309,-2.54) -59.309,-2.032 ; v4(-59.309,-1.524) -59.309,-2.032
  Bottom Layer w0.508: -61.468,-38.735 -61.468,-37.389 -61.443,-37.363 -57.099,-37.363 -56.77,-37.693 C40.2@-56.77,-38.608
  Bottom Layer w0.635: v1(-79.375,-59.055) -79.375,-54.673 -79.311,-54.61 ; v1(-75.692,-2.032) -75.692,-0.762 -70.231,-0.762 v1(-70.231,-2.159) ; -61.866,-57.768 -61.849,-57.785 ; v3(-52.426,-12.852) -52.426,-16.053 v3(-52.4,-16.078) ; CON4.1@-49.784,-8.636 -49.784,-7.747 -50.165,-7.366 -52.07,-7.366 -52.578,-6.858 -52.578,-5.283 -51.994,-4.699 -50.444,-4.699 -49.784,-4.039 CON5.1@-49.784,-2.032 -49.784,-0.762 -38.608,-0.762 CON2.1@-38.608,-2.032
  Bottom Layer w0.762: -80.853,-29.129 C45.2@-78.232,-29.129 -75.612,-29.129 -75.185,-28.701 v1(-75.185,-25.782) ; v1(-79.375,-21.622) -79.534,-21.622 -80.899,-22.987 -80.899,-29.083 -80.899,-36.576 -80.899,-51.498 v1(-79.311,-51.498) -79.311,-54.61 v1(-75.057,-54.61) -70.612,-54.61 -70.231,-54.991 v1(-70.231,-56.642) -70.231,-58.494 -66.258,-58.494 C15.2@-65.532,-57.768 -62.869,-57.768 v1(-62.852,-57.785) -61.849,-57.785 ; R81.1@-75.159,-43.688 -74.422,-43.688 v1(-73.66,-44.45) ; R67.2@-71.476,-2.159 v1(-70.231,-2.159) ; R64.2@-66.523,-2.032 v1(-65.151,-2.032) ; v4(-66.421,-28.194) v1(-62.992,-28.194) v1(-62.992,-35.052) ; v1(-62.992,-38.735) -61.468,-38.735 U7.1@-61.468,-40.132 ; -61.866,-57.768 v1(-59.944,-57.768) C19.2@-54.356,-57.768 ; C40.2@-56.77,-38.608 C21.1@-54.864,-38.608 ; C20.1@-54.864,-44.196 -54.356,-44.704 U5.1@-52.349,-44.704 ; v1(-54.356,-53.975) C19.2@-54.356,-57.768 ; v3(-53.492,-43.561) U5.1@-52.349,-44.704 ; v1(-52.451,-50.8) v1(-49.13,-50.8) -46.082,-53.848 -42.618,-53.848 ; U5.1@-52.451,-44.831 U5.1@-52.324,-44.704 U5.1@-52.349,-44.704 ; C9.2@-42.037,-43.815 -42.037,-45.847 -42.618,-46.428 v1(-42.618,-52.959) -42.618,-53.848 ; -41.986,-60.452 -42.02,-60.418 C14.2@-42.02,-55.372 -42.618,-54.774 -42.618,-53.848 ; v1@-38.964,-6.629 -38.608,-6.274 ; v1@-38.608,-5.74 CON2.1@-38.608,-2.032 v1@-31.369,-2.032 ; v6@-38.227,-16.383 -38.227,-6.096 ; v1(-31.369,-3.327) v1(-31.369,-2.159) v1@-31.369,-2.032 ; v1(-26.035,-60.579) -54.356,-60.579 C19.2@-54.356,-57.768 ; v1(-26.035,-53.721) v1(-26.035,-52.578) -26.035,-49.403 CON3.1@-25.908,-49.276 ; v1(-25.171,-27.051) -25.171,-24.257 -24.728,-23.814 v1(-12.446,-23.814) v1(-12.446,-25.044) v1(-12.446,-26.162) v1(-12.446,-27.127) v1(-12.446,-28.016) -12.446,-28.321 -15.113,-30.988 C44.2@-19.16,-30.988 ; v1@-24.536,-2.54 v1(-24.511,-2.54) -25.019,-2.032 v1@-31.369,-2.032 ; Q6.2@-18.288,-41.859 v1(-18.288,-39.37)
  other v1: -50.089,-60.604 -47.219,-60.604 -18.009,-60.554 -38.583,-5.74
  other v6: -38.316,-16.561
JTCK_SWCLK: CON6.3 U6.76 | length 10.5
  Top Layer w0.254: U6.76@-34.01,-36.918 -34.01,-37.897 -33.172,-38.735 -31.242,-38.735 -30.099,-39.878 -30.099,-43.053 CON6.3@-28.956,-44.196
JTMS_SWDIO: CON6.2 U6.72 | length 16.3
  Top Layer w0.254: U6.72@-37.06,-38.468 -37.06,-37.317 -36.911,-37.168 -35.4,-37.168 -33.325,-39.243 -31.369,-39.243 -30.632,-39.98 -30.632,-45.06 CON6.2@-28.956,-46.736
LDO_EN: R5.2 U2.5 | length 10.3
  Top Layer w0.203: -79.502,-54.229 -77.978,-52.705
  Top Layer w0.254: R5.2@-80.645,-58.395 -81.407,-57.633 -81.407,-54.61 -81.026,-54.229 -79.502,-54.229 ; -77.978,-52.705 -76.962,-52.705 -76.774,-52.893 U2.5@-76.774,-53.588
LED0_PA1: LED_SMD1.2 U6.89 | length 30.4
  Top Layer w0.254: U6.89@-34.01,-30.418 -30.545,-30.418 -28.753,-28.626 -28.753,-24.562 -24.892,-20.701 -12.192,-20.701 -11.201,-19.71 LED_SMD1.2@-11.201,-18.923
LED1_PA4: LED_SMD2.2 U6.90 | length 31.6
  Top Layer w0.254: U6.90@-34.01,-29.918 -30.654,-29.918 -29.185,-28.448 -29.185,-24.455 -24.796,-20.066 -13.284,-20.066 -12.065,-18.847 -12.065,-18.11 -11.201,-17.247 LED_SMD2.2@-11.201,-16.51
LED2_PC4: LED_SMD3.2 U6.91 | length 33.7
  Top Layer w0.254: U6.91@-34.01,-29.418 -30.753,-29.418 -29.616,-28.281 -29.616,-24.348 -24.827,-19.558 -13.665,-19.558 -12.573,-18.466 -12.573,-14.605 -12.065,-14.097 LED_SMD3.2@-11.201,-14.097
LED3_PA12: LED_SMD4.2 U6.92 | length 35.8
  Top Layer w0.254: U6.92@-34.01,-28.918 -30.792,-28.918 -30.048,-28.174 -30.048,-24.241 -24.857,-19.05 -14.046,-19.05 -13.208,-18.212 -13.208,-12.192 -12.7,-11.684 LED_SMD4.2@-11.201,-11.684
LED4_PA11: LED_SMD5.2 U6.93 | length 36.7
  Top Layer w0.254: U6.93@-34.01,-28.418 -32.479,-28.418 -32.373,-28.524 -31.889,-28.524 -31.783,-28.418 -31.009,-28.418 -30.455,-27.864 -30.455,-24.108 -24.888,-18.542 -14.351,-18.542 -13.843,-18.034 -13.843,-11.684 -11.43,-9.271 LED_SMD5.2@-11.201,-9.271
LEDK1: R112.1 TFT_CON1.34 | length 14.9
  Bottom Layer w0.254: TFT_CON1.34@-75.819,-7.122 -64.506,-7.122 R112.1@-61.976,-9.652
LEDK2: R113.1 TFT_CON1.35 | length 14.3
  Bottom Layer w0.254: TFT_CON1.35@-75.819,-6.622 -62.974,-6.622 R113.1@-61.976,-7.62
LEDK3: R114.1 TFT_CON1.36 | length 14.1
  Bottom Layer w0.254: TFT_CON1.36@-75.819,-6.122 -64.161,-6.122 -63.627,-5.588 R114.1@-61.976,-5.588
MCU_AD_BAT_ADC12_IN8_PB0: R24.1 TEST14.1 U6.35 | length 50.8
  Top Layer w0.254: U6.35@-49.11,-29.418 -49.101,-29.427 -48.134,-29.427 -48.059,-29.502 v2(-48.017,-29.502) ; v2(-43.688,-34.798) -43.659,-34.769 -43.659,-34.566 -41.783,-32.69 -41.783,-29.616 v2(-41.808,-29.591) ; v2(-28.346,-37.084) -27.407,-37.084 -26.949,-37.541 -26.949,-39.091 -24.511,-41.529 -17.145,-41.529 -16.764,-41.91 R24.1@-16.764,-42.672 -17.78,-42.672 -18.034,-42.926 -18.034,-46.99 TEST14.1@-17.78,-47.244
  Bottom Layer w0.254: v2(-48.017,-29.502) -42.52,-29.502 -42.431,-29.591 v2(-41.808,-29.591) ; v2(-43.688,-34.798) -42.875,-35.611 -33.147,-35.611 -31.521,-37.236 -28.499,-37.236 v2(-28.346,-37.084)
MCU_AD_VBUS_ADC12_IN15_PC5: C16.2 R17.1 R18.2 TEST13.1 U6.34 | length 65.8
  Top Layer w0.254: C16.2@-52.553,-26.06 -52.553,-27.026 v2(-52.4,-27.178) ; U6.34@-49.11,-28.918 v2@-48.009,-28.918 ; v2@-42.912,-34.627 -42.912,-34.453 -41.275,-32.817 -41.275,-29.15 v2@-41.427,-28.997 ; v2@-29.87,-36.906 -29.87,-38.583 -27.432,-41.021 -27.432,-44.323 -26.543,-45.212 -25.019,-45.212 -22.479,-47.752 -20.066,-47.752 -19.431,-48.387 -14.732,-48.387 ; TEST13.1@-14.732,-47.244 -14.732,-48.387 ; R17.1@-11.176,-47.371 R18.2@-9.601,-47.371 -9.576,-47.396 -9.576,-48.158 -9.804,-48.387 -14.732,-48.387
  Bottom Layer w0.254: v2@-52.375,-27.178 -51.105,-28.448 ; -51.105,-28.441 -48.309,-28.441 v2@-47.92,-28.829 ; v2(-47.879,-28.829) -42.139,-28.829 -42.012,-28.956 v2(-41.427,-28.956) ; v2@-42.926,-34.671 -42.494,-35.103 -32.995,-35.103 -31.369,-36.728 v2(-29.87,-36.728)
  other v2: -42.941,-34.656
MCU_BL_CTR: R116.1 U6.5 | length 16.1
  Top Layer w0.254: v2(-39.243,-19.05) -39.751,-18.542 -39.751,-17.463 -39.675,-17.387 -39.675,-16.903 -39.751,-16.827 -39.751,-16.51 -39.243,-16.002 -38.735,-16.002 -38.1,-15.367 -38.1,-11.43 R116.1@-38.989,-10.541 ; U6.5@-37.56,-23.368 -37.56,-21.431 v2(-37.338,-21.209)
  Bottom Layer w0.254: v2(-39.243,-19.05) -37.868,-19.05 -37.338,-19.58 v2(-37.338,-21.209)
MCU_BOOT0: R46.2 R47.2 U6.94 | length 8.8
  Top Layer w0.254: U6.94@-34.01,-27.918 -32.153,-27.918 v3(-32.131,-27.94) ; v3(-29.286,-30.48) -28.092,-30.48 R47.2@-27.965,-30.607 R46.2@-27.965,-32.258
  Bottom Layer w0.254: v3(-32.131,-27.94) -29.591,-30.48 v3(-29.286,-30.48)
MCU_BOOT1: R44.2 R45.2 U6.37 | length 18.8
  Top Layer w0.254: R44.2@-55.067,-42.139 R45.2@-51.816,-42.139 ; R45.2@-51.791,-42.139 -51.791,-39.345 -51.435,-38.989 v2(-50.114,-38.989) ; v2(-51.448,-36.576) -51.791,-36.233 -51.791,-35.013 -50.497,-33.72 -50.497,-30.939 -49.985,-30.427 -49.119,-30.427 U6.37@-49.11,-30.418
  Bottom Layer w0.254: v2(-51.448,-36.576) -50.114,-37.91 v2(-50.114,-38.989)
MCU_CHARGE_C_PB1: R3.2 U6.58 | length 23.9
  Top Layer w0.254: U6.58@-44.06,-38.468 -44.06,-39.658 -43.79,-39.929 -42.545,-39.929 -42.291,-40.183 -42.291,-44.475 -41.554,-45.212 -36.881,-45.212 -34.722,-47.371 -33.985,-47.371 -33.198,-48.158 -32.385,-48.158 -30.734,-49.809 -30.734,-52.195 R3.2@-30.505,-52.424
MCU_CTR_ALARM_BUZZER_PC0: R75.2 U6.53 | length 41.4
  Top Layer w0.254: v2(-69.088,-38.735) -67.691,-38.735 -66.878,-37.922 -66.878,-37.186 -64.084,-34.392 -62.128,-34.392 -61.468,-35.052 v2(-61.468,-35.56) ; v2(-50.47,-39.624) -50.47,-39.827 -50.292,-40.005 -46.888,-40.005 -46.56,-39.677 U6.53@-46.56,-38.468
  Bottom Layer w0.254: R75.2@-75.159,-45.72 -70.485,-45.72 -69.596,-44.831 -69.596,-38.989 -69.342,-38.735 v2(-69.088,-38.735) ; v2(-61.468,-35.56) -61.239,-35.789 -54,-35.789 -50.74,-39.049 -50.74,-39.354 v2(-50.47,-39.624)
MCU_CTR_VCC_CO2_PC1: R69.2 U6.87 | length 19.7
  Top Layer w0.254: U6.87@-34.01,-31.418 v3(-31.267,-31.418)
  Bottom Layer w0.254: v3(-31.267,-31.418) -30.025,-31.418 -26.822,-34.62 -26.822,-39.218 -24.511,-41.529 -24.511,-42.164 -23.216,-43.459 R69.2@-22.352,-43.459
MCU_CTR_VCC_SD_PB14: R76.2 U6.84 | length 17.3
  Top Layer w0.254: U6.84@-34.01,-32.918 -29.947,-32.918 -29.362,-33.503 -26.111,-33.503 -24.689,-32.08 -24.689,-29.134 -22.479,-26.924 R76.2@-21.361,-26.924
MCU_I2C1_SCL_PB8: M4.4 R74.1 U6.95 | length 18.6
  Top Layer w0.254: U6.95@-34.01,-27.418 -32.435,-27.418 -32.373,-27.356 -31.172,-27.356 -30.886,-27.071 -30.886,-24.001 -26.67,-19.785 -26.67,-18.618 -25.222,-17.17 R74.1@-25.146,-17.17 -22.782,-17.17 M4.4@-22.352,-16.74
MCU_I2C1_SDA_PB9: M4.1 R82.1 U6.96 | length 24.3
  Top Layer w0.254: U6.96@-34.01,-26.918 -34.001,-26.909 -31.583,-26.909 -31.318,-26.645 -31.318,-23.894 -27.051,-19.627 R82.1@-27.051,-17.17 -27.661,-17.17 -28.067,-16.764 -28.067,-15.138 -27.026,-14.097 -25.527,-14.097 -25.146,-13.716 -22.987,-13.716 -22.352,-14.351 M4.1@-22.352,-15.24
MCU_I2C2_SCL_PB10: R26.1 R68.1 TOUCH_CON1.5 U6.47 | length 37.8
  Top Layer w0.203: -72.288,-24.155 -72.288,-24.13
  Top Layer w0.254: TOUCH_CON1.5@-75.184,-28.004 -73.343,-28.004 -72.644,-27.305 -72.644,-24.511 -72.288,-24.155 ; -72.288,-24.13 -70.358,-24.13 R68.1@-69.596,-24.892 ; R26.1@-69.596,-23.368 R68.1@-69.596,-24.892 ; v2(-57.909,-31.229) -57.922,-31.242 -58.388,-31.242 -58.896,-31.75 -63.754,-31.75 -65.608,-29.896 -65.608,-27.838 -67.158,-26.289 -69.215,-26.289 -69.596,-25.908 R68.1@-69.596,-24.892 ; v2(-50.621,-34.949) -50.58,-34.949 -50.35,-35.18 -50.282,-35.18 -50.282,-35.189 -50.053,-35.418 U6.47@-49.11,-35.418
  Bottom Layer w0.254: v2(-57.909,-31.229) -57.909,-31.242 -57.29,-31.242 -56.394,-32.137 -54.95,-32.137 -52.416,-34.671 -50.941,-34.671 -50.662,-34.949 v2(-50.621,-34.949)
MCU_I2C2_SDA_PB11: R27.1 R79.2 TOUCH_CON1.4 U6.48 | length 33.2
  Top Layer w0.254: TOUCH_CON1.4@-75.184,-29.004 -71.326,-29.004 -69.621,-30.709 R79.2@-69.621,-31.75 -69.621,-33.503 R27.1@-69.596,-33.528 -69.596,-34.29 -69.342,-34.544 -66.954,-34.544 -64.668,-32.258 -58.865,-32.258 -58.484,-31.877 v2(-58.039,-31.877) ; v2(-51.206,-35.255) -50.544,-35.918 U6.48@-49.11,-35.918
  Bottom Layer w0.254: v2(-58.039,-31.877) -57.194,-31.877 -56.552,-32.518 -55.108,-32.518 -52.371,-35.255 v2(-51.206,-35.255)
MCU_NRST: C38.2 R56.2 R70.2 R110.1 U6.14 | length 66.2
  Top Layer w0.254: R110.1@-68.072,-37.592 -67.742,-37.262 -67.666,-37.262 -64.313,-33.909 -61.354,-33.909 -61.329,-33.934 -58.166,-33.934 -57.658,-34.442 -57.658,-37.146 -56.471,-38.332 -55.118,-38.332 ; R70.2@-54.127,-35.433 -54.991,-35.433 -55.118,-35.56 -55.118,-38.332 ; U6.14@-42.06,-23.368 -42.06,-24.996 ; v2@-37.948,-25.095 -42.06,-25.095 ; C38.2@-27.965,-27.305 C38.2@-27.94,-27.28 ; C38.2@-27.965,-27.051 R56.2@-27.965,-25.451 -27.965,-24.663 v3(-26.924,-23.622) ; -55.118,-38.332 -49.127,-38.332 -48.895,-38.1 -48.463,-38.1 -45.999,-35.636 -45.999,-34.477 -43.612,-32.089 -43.612,-27.241 -43.485,-27.114 -43.485,-26.035 -43.231,-25.781 -42.672,-25.781 -42.06,-25.169 -42.06,-25.095 ; -42.06,-25.095 -42.06,-24.996 ; -42.06,-25.095 -42.062,-24.994 -42.06,-24.996
  Bottom Layer w0.254: v2@-37.922,-25.044 v2(-37.922,-25.095) -37.617,-25.4 -36.22,-25.4 -35.966,-25.146 -34.874,-25.146 -34.823,-25.095 -28.397,-25.095 v3(-26.924,-23.622)
MCU_PC14_OSC32_IN: C34.1 U6.8 X2.1 | length 9.9
  Top Layer w0.254: U6.8@-39.06,-23.368 -39.06,-20.613 -37.37,-18.923 -36.576,-18.923 -35.56,-17.907 -35.052,-17.907 C34.1@-34.925,-17.78 -34.925,-16.51 X2.1@-34.544,-16.129
MCU_PC15_OSC32_OUT: C35.1 U6.9 X2.2 | length 8.4
  Top Layer w0.254: U6.9@-39.56,-23.368 -39.56,-20.574 -37.528,-18.542 -37.233,-18.542 -37.084,-18.393 C35.1@-37.084,-17.78 X2.2@-37.084,-16.129
MCU_PH0_OSC_8M_IN: C36.1 R49.2 U6.12 X3.1 | length 15.1
  Top Layer w0.254: C36.1@-43.18,-17.78 -44.069,-18.669 -44.069,-20.828 -43.155,-21.742 -41.656,-21.742 -41.06,-22.338 U6.12@-41.06,-23.368
  Top Layer w0.762: R49.2@-45.898,-18.059 -45.618,-17.78 C36.1@-43.18,-17.78 -43.18,-17.374 -41.084,-15.278 X3.1@-41.084,-14.478
MCU_PH1_OSC_8M_OUT: C37.1 R49.1 U6.13 X3.2 | length 16.5
  Top Layer w0.254: R49.1@-48.438,-17.907 R49.1@-48.26,-18.085 -47.422,-18.923 -44.958,-18.923 -44.577,-19.304 -44.577,-21.031 -43.459,-22.149 -41.859,-22.149 -41.56,-22.448 U6.13@-41.56,-23.368
  Top Layer w0.762: X3.2@-51.054,-14.478 -50.648,-14.884 C37.1@-50.648,-17.907 R49.1@-48.438,-17.907
MCU_SDIO_CK: SD1.5 U6.80 | length 17.5
  Top Layer w0.254: U6.80@-34.01,-34.918 -32.697,-34.918 -32.36,-35.255 -24.841,-35.255 -24.105,-34.519 -19.761,-34.519 -19.107,-33.864 SD1.5@-17.272,-33.864
MCU_SDIO_CMD: R84.1 SD1.3 U6.83 | length 19.1
  Top Layer w0.203: U6.83@-34.01,-33.418 -33.181,-33.418 -31.826,-34.773 -29.54,-34.773
  Top Layer w0.254: -29.54,-34.773 -25.121,-34.773 -24.384,-34.036 -20.013,-34.036 -19.812,-33.835 R84.1@-19.812,-33.02 -18.456,-31.664 SD1.3@-17.272,-31.664
MCU_SDIO_D0: R78.1 SD1.7 U6.65 | length 30.3
  Top Layer w0.203: U6.65@-40.56,-38.468 -40.564,-38.472 -40.564,-39.675 v4(-40.03,-40.208) ; v4(-33.401,-37.592) -33.147,-37.592 -32.766,-37.211 -31.42,-37.211 -29.921,-35.712 -25.171,-35.712 -23.876,-37.008 -23.876,-37.795 -23.19,-38.481 -20.066,-38.481 -19.812,-38.227 R78.1@-19.812,-37.465
  Top Layer w0.254: R78.1@-19.812,-37.465 -19.812,-36.725 -19.663,-36.576 -19.05,-36.576 -18.538,-36.064 SD1.7@-17.288,-36.064
  Bottom Layer w0.203: v4(-40.03,-40.208) -35.662,-40.208 -33.401,-37.948 v4(-33.401,-37.592)
MCU_SDIO_D1: R72.1 SD1.8 U6.66 | length 31.8
  Top Layer w0.203: U6.66@-40.06,-38.468 -40.06,-39.366 -39.091,-40.335 v4(-39.091,-40.665) ; v4(-32.868,-38.151) -32.868,-38.049 -32.512,-37.694 -31.471,-37.694 -29.845,-36.068 -25.502,-36.068 -24.359,-37.211 -24.359,-39.573 -23.495,-40.437 -20.142,-40.437 -19.812,-40.107 R72.1@-19.812,-39.497
  Top Layer w0.254: R72.1@-19.812,-39.497 -19.812,-39.116 -18.796,-38.1 -18.796,-37.623 -18.61,-37.437 -17.545,-37.437 SD1.8@-17.272,-37.164
  Bottom Layer w0.203: v4(-39.091,-40.665) -35.382,-40.665 v4(-32.868,-38.151)
MCU_SDIO_D2: R111.1 SD1.1 U6.78 | length 24
  Top Layer w0.203: U6.78@-34.01,-35.918 -33.094,-35.918 -32.258,-36.754 -31.521,-36.754 -30.785,-36.017 v4(-30.785,-35.89) ; v3(-30.912,-33.477) -30.023,-33.477 -29.566,-33.934
  Top Layer w0.254: -29.566,-33.934 -25.883,-33.934 -24.257,-32.309 -24.257,-30.607 -23.622,-29.972 -20.013,-29.972 -19.812,-29.771 R111.1@-19.812,-28.956 -19.304,-29.464 SD1.1@-17.272,-29.464
  Bottom Layer w0.203: v3(-30.912,-33.477) -30.912,-35.204 -30.785,-35.331 v4(-30.785,-35.89)